# Allegro board LinkingInterfaceV1.3.brd
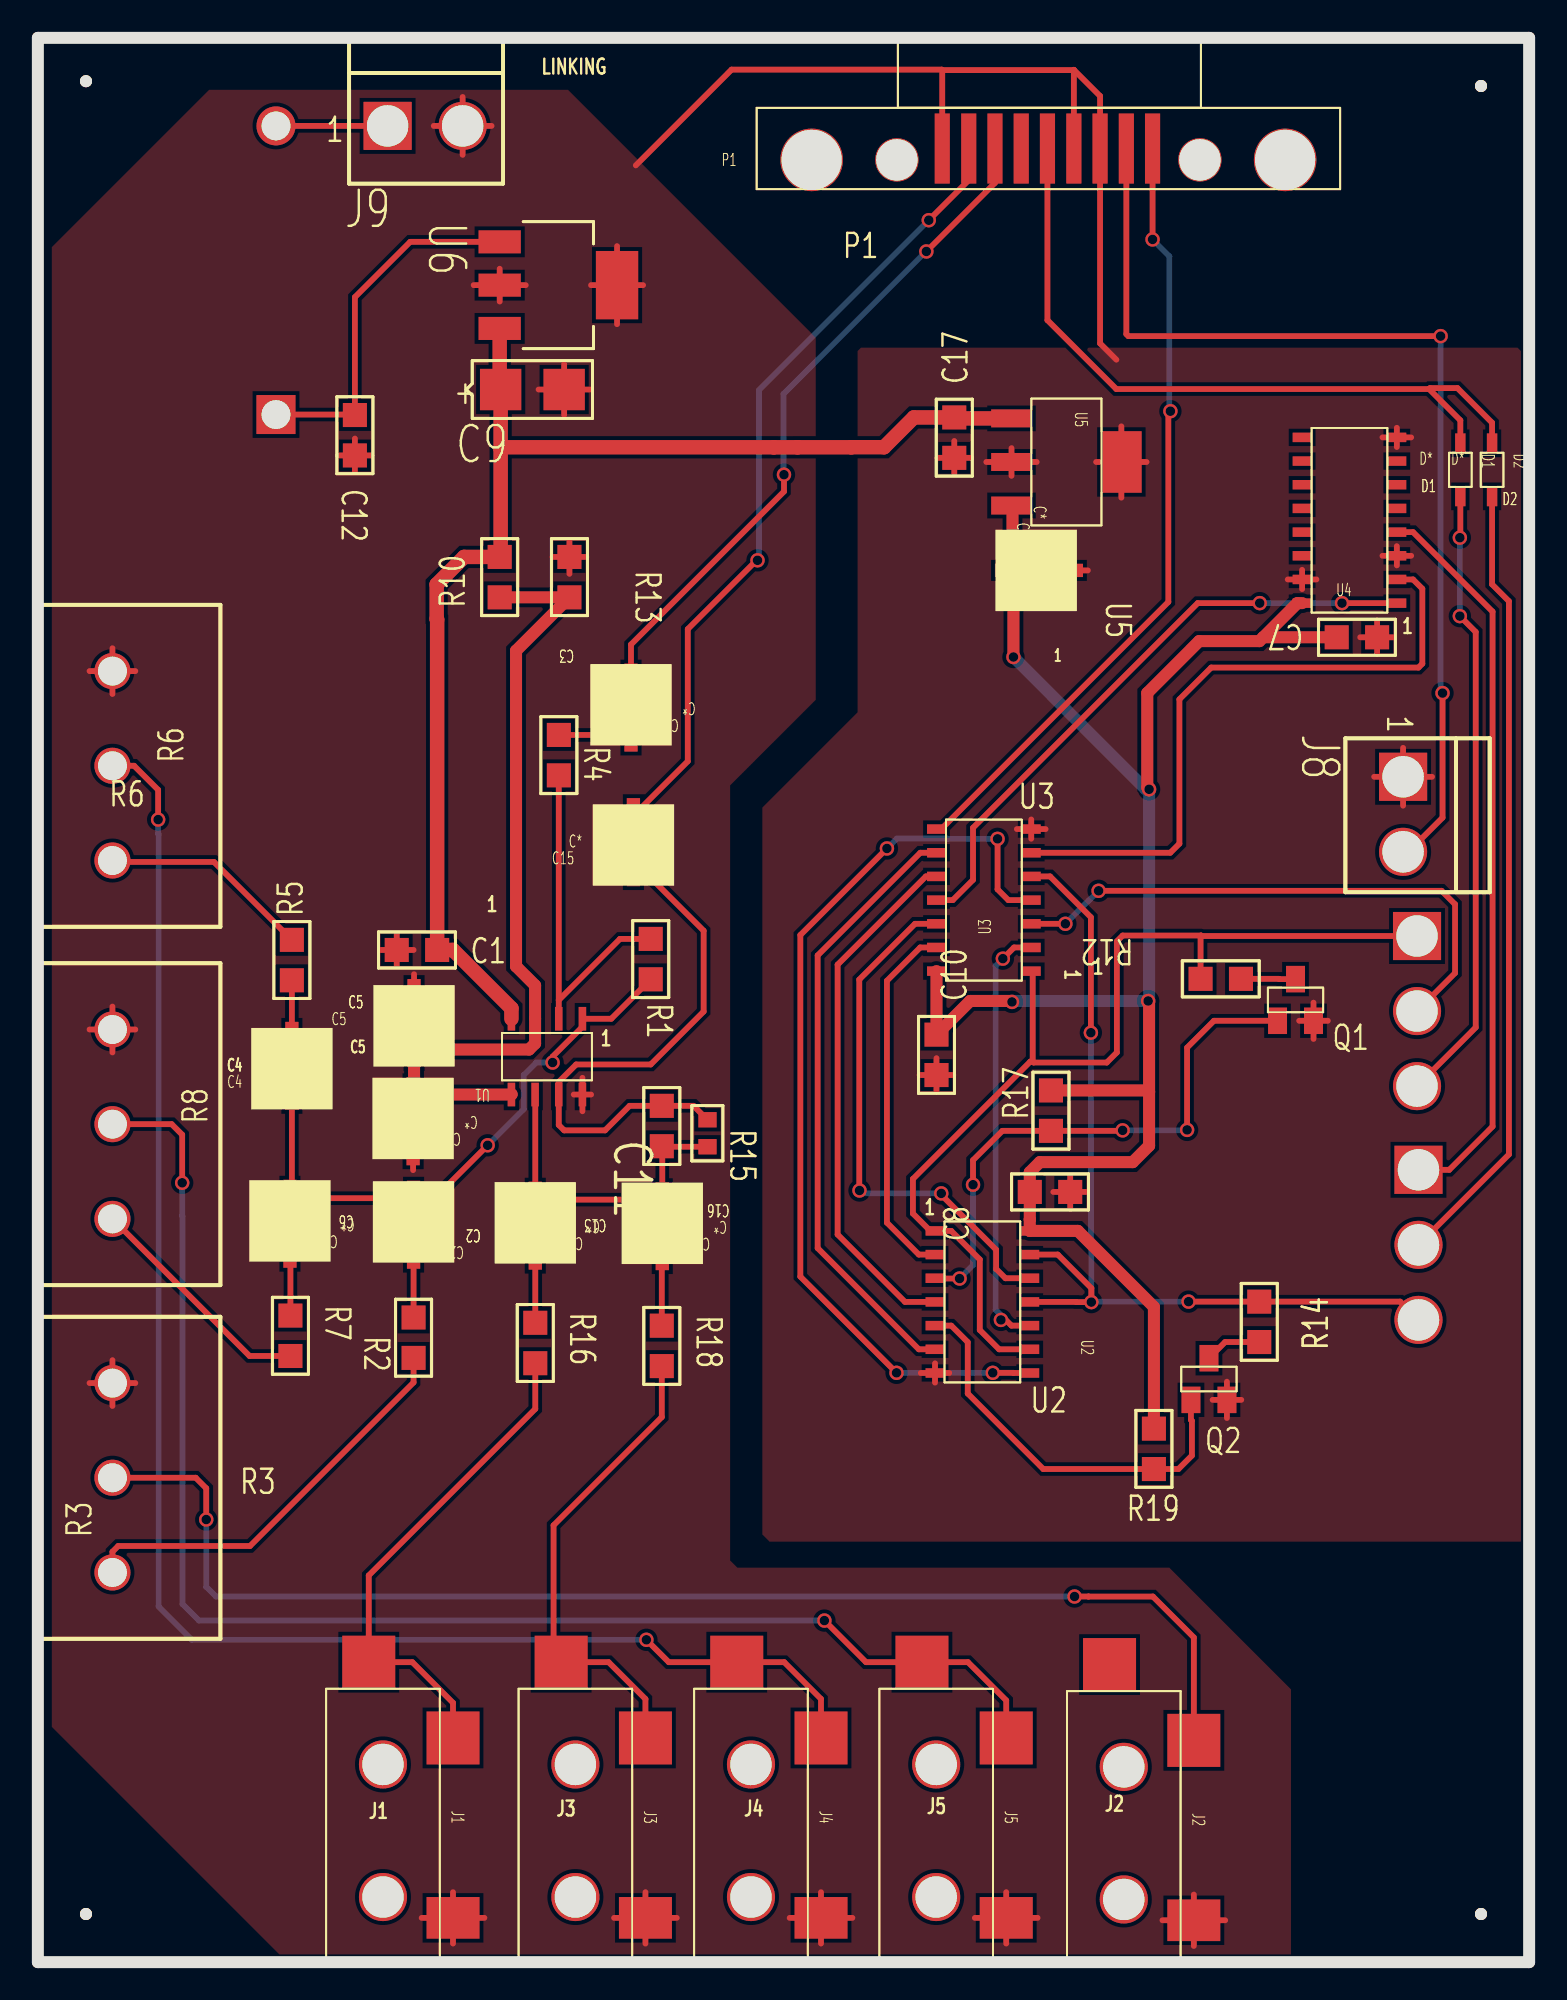
[diagram p0: board, top side]
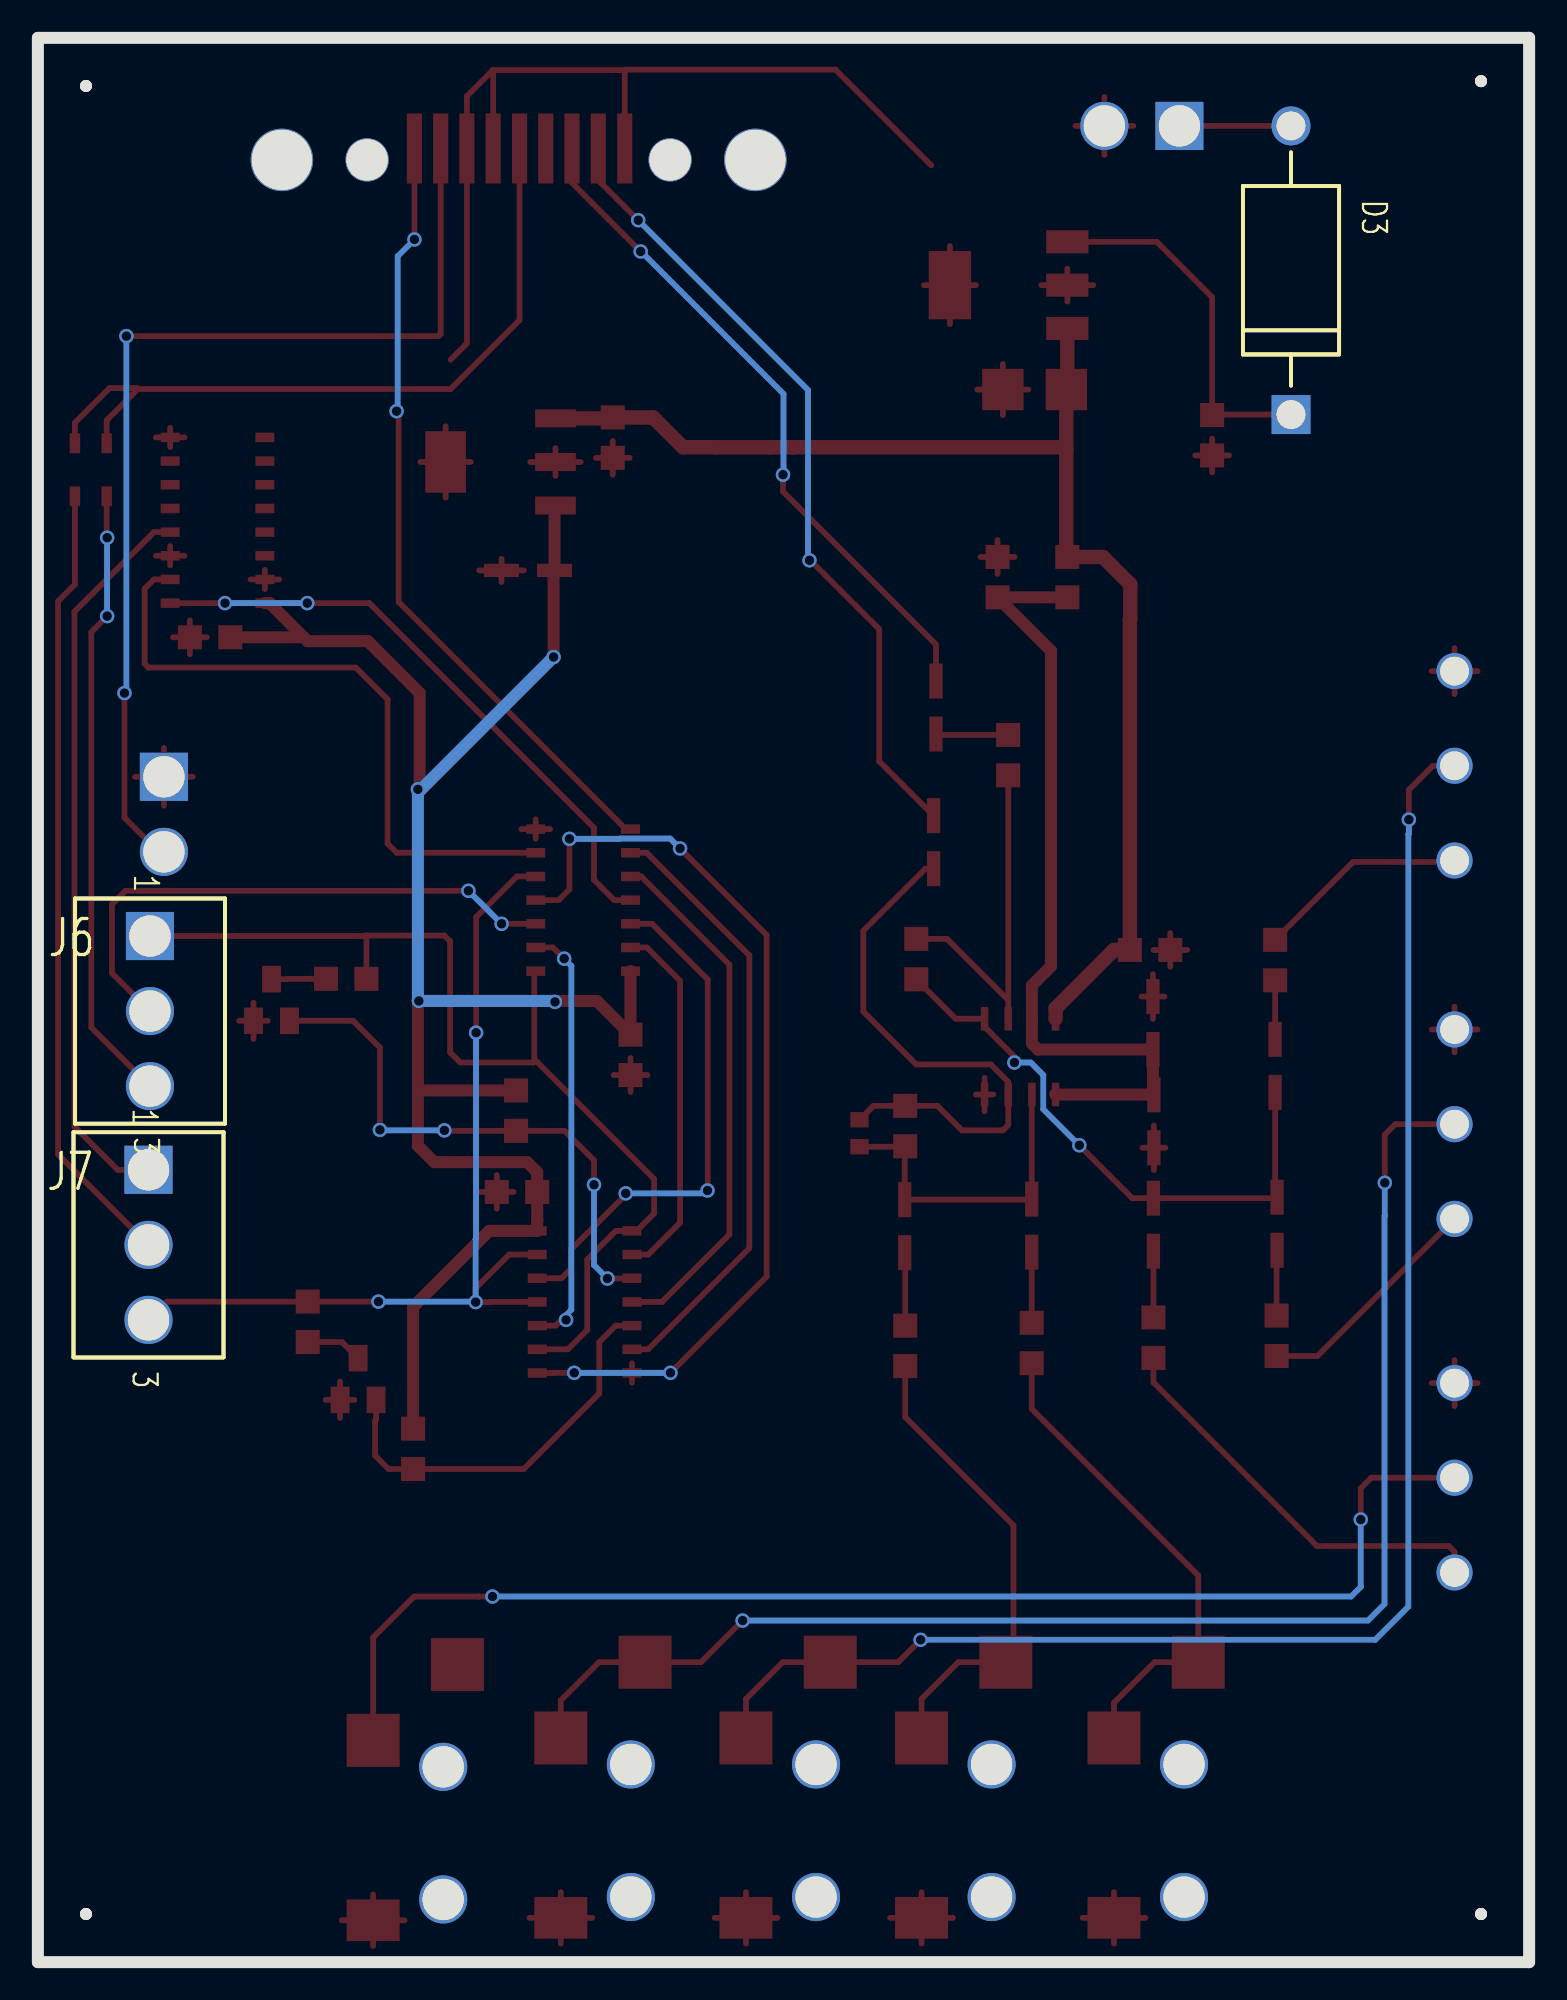
[diagram p1: board, bottom side, seen from below]

Outline 78.74 x 101.6 mm; copper layers: TOP, BOTTOM. Coordinates in mm from the lower left corner of the outline.
Outline path: 0,101.6 78.74,101.6 ; 0,101.6 78.74,101.6 ; 0,101.6 0,0 ; 0,101.6 0,0 ; 78.74,101.6 78.74,0 ; 78.74,101.6 78.74,0 ; 0,0 78.74,0 ; 0,0 78.74,0

## Placement (name value [footprint] x y rotation side)
C1  100nF  [SMC0805]  18.95 53.44 0 top
C2  10uF  [1_UF_CAP]  19.84 40.34 180 top
C3  1uF  [1_UF_CAP]  31.32 67.64 180 top
C4  10uF  [1_UF_CAP]  13.41 45.92 0 top
C5  4.7uF  [1_UF_CAP]  19.86 48.18 0 top
C6  10uF  [1_UF_CAP]  13.31 40.39 180 top
C7  100nF  [SMC0805]  70.71 69.95 180 top
C8  100nF  [SMC0805]  54.51 40.67 180 top
C9  22uF/Tant  [EIAB_SMCT3528_12]  24.43 83.03 0 top
C10  100nF  [SMC0805]  47.45 46.84 90 top
C11  100pF  [SMC0603]  35.36 44.48 270 top
C12  470nF  [SMC0805]  16.74 81.69 270 top
C13  10uF  [1_UF_CAP]  26.26 40.28 180 top
C14  10uF  [1_UF_CAP]  51.46 73.48 270 top
C15  10uF  [1_UF_CAP]  31.45 57.73 0 top
C16  10uF  [1_UF_CAP]  32.97 40.26 180 top
C17  100nF  [SMC0805]  48.39 79.43 90 top
C18  4.7uF  [1_UF_CAP]  19.81 45.8 180 top
D1  1N4148  [1N4148_SOD523]  75.11 77.39 0 top
D2  1N4148  [1N4148_SOD523]  76.78 77.39 0 top
D3  SB1245  [DAX600_60D]  12.57 96.95 270 bottom
J1  TX_ECHOLINK  [35MMJACK]  21.97 2.29 270 top
J2  RX_ECHOLINK  [35MMJACK]  61.09 2.16 270 top
J3  TX_ALLSTAR  [35MMJACK]  32.13 2.29 270 top
J4  RX_ALLSTAR  [35MMJACK]  41.4 2.29 270 top
J5  RX_DTMF  [35MMJACK]  51.18 2.29 270 top
J6  3pinHeader  [BLKCON156VHTM1SQSW3123]  72.82 54.18 270 bottom
J7  3pinHeader  [BLKCON156VHTM1SQSW3123]  72.9 41.83 270 bottom
J8  2Pin Header  [BLKCON156_VHTM1SQ_SW156_2]  72.09 62.59 270 top
J9  0.156 VH  [BLKCON156_VHTM1SQ_SW156_2]  18.47 96.95 0 top
NOREF  -  [unnamed]  76.2 2.54 180 bottom
NOREF#2  -  [unnamed]  2.54 99.31 180 bottom
NOREF#3  -  [unnamed]  2.54 2.54 180 bottom
NOREF#4  -  [unnamed]  76.2 99.06 180 bottom
P1  CONNECTOR DB9  [DB9_263_R001]  47.75 95.76 0 top
Q1  -  [2N4401]  67.39 49.63 0 top
Q2  -  [2N4401]  62.81 29.62 0 top
R1  51k  [SMR0805]  32.36 54.03 270 top
R2  22k  [SMR0805]  19.84 34.04 270 top
R3  10k  [P60-20748]  3.94 20.57 90 top
R4  51k  [SMR0805]  27.51 64.8 270 top
R5  22k  [SMR0805]  13.41 51.84 90 top
R6  10k  [P60-20748]  3.94 58.17 90 top
R7  7.5k  [SMR0805]  13.34 34.14 270 top
R8  10k  [P60-20748]  3.94 39.24 90 top
R10  51k  [SMR0805]  24.38 72.06 90 top
R12  10K  [SMR0805]  63.53 51.92 180 top
R13  51k  [SMR0805]  28.07 74.19 270 top
R14  10K  [SMR0805]  64.49 32.74 90 top
R15  51k  [SMR0805]  32.94 45.21 270 top
R16  51k  [SMR0805]  26.26 33.76 270 top
R17  10K  [SMR0805]  53.49 43.89 90 top
R18  51k  [SMR0805]  32.94 33.6 270 top
R19  10K  [SMR0805]  58.93 26.04 90 top
U1  TL072  [TL082]  28.75 49.81 180 top
U2  74HC04  [74HC0]  47.37 38.61 270 top
U3  74HC08  [74HC0]  52.45 52.32 90 top
U4  -  [74HC157]  71.75 71.76 90 top
U5  LM2936/SOT  [LM2936_SOT]  51.36 81.51 270 top
U6  LM2940 / SOT223  LDO  [SOT223_1234]  24.38 90.83 270 top

## Library data of the parts
C1 C7 C8 C10-C12 C17 = C NP
C2 C4-C6 C14 C15 C18 = CAP POL
C3 C13 C16 = CAPACITOR POL
C9 = C POL
D1 D2 = 1N4148
D3 = DIODE SCHOTTKY_0
J1-J5 = PHONE JACK-3_2
J6 J7 = 3pinHeader_0
J8 = 2Pin Header
J9 = HEADER 2_4
P1 = CONNECTOR DB9
Q1 Q2 = 2N4401
R1 R2 R4 R5 R7 R10 R12-R19 = RESISTOR
R3 R6 R8 = POT
U1 = TL062_2
U2 = 74HC04_4
U3 = 74HC08_3
U4 = 74HC157_4
U5 = LM2936/SO_3
U6 = 78L05/TO92_4

## Footprints (pads in the part's own frame, mm; a bottom-side part is the same pattern mirrored in y, then rotated)
1_UF_CAP
  rect 0.701x1.849 smd: 1(0,0) 2(0,2.799)
1N4148_SOD523
  rect 0.551x1.049 smd: 1(0,0) 2(0,2.799)
2N4401
  rect 1.001x1.4 smd: 1(-0.03,0.071) 2(-0.98,2.271) 3(-1.93,0.071)
35MMJACK
  round 2.54 hole 2.184: (-8.151,-3.749) (-1.151,-3.749)
  rect 2.2x2.799 smd: 1(-0.051,-0.051)
  rect 2.799x2.799 smd: 2(-9.55,-0.051) 3(-13.551,-4.501)
74HC0
  rect 0.5x1.001 smd: 1(0,0) 2(1.25,0) 3(2.499,0) 4(3.749,0) 5(5.001,0) 6(6.251,0) 7(7.501,0) 8(7.501,5.001) 9(6.251,5.001) 10(5.001,5.001) 11(3.749,5.001) 12(2.499,5.001) 13(1.25,5.001) 14(0,5.001)
74HC157
  rect 0.5x1.001 smd: 1(0,0) 2(1.25,0) 3(2.499,0) 4(3.749,0) 5(5.001,0) 6(6.251,0) 7(7.501,0) 8(8.75,0) 9(8.75,5.001) 10(7.501,5.001) 11(6.251,5.001) 12(5.001,5.001) 13(3.749,5.001) 14(2.499,5.001) 15(1.25,5.001) 16(0,5.001)
BLKCON156_VHTM1SQ_SW156_2
  rect 2.54x2.54 hole 2.184: 1(0,0)
  round 2.54 hole 2.184: 2(3.962,0)
BLKCON156VHTM1SQSW3123
  rect 2.54x2.54 hole 2.184: 1(0,0)
  round 2.54 hole 2.184: 2(3.962,0) 3(7.925,0)
DAX600_60D
  round 2.057 hole 1.524: 1(0,0)
  rect 2.057x2.057 hole 1.524: 2(15.24,0)
DB9_263_R001
  round 3.302 hole 3.175: (-6.896,-0.599) (18.105,-0.599)
  round 2.286 hole 2.184 unplated: (-2.395,-0.599) (13.604,-0.599)
  rect 0.8x3.701 smd: 1(0,0) 2(1.4,0) 3(2.784,0) 4(4.171,0) 5(5.555,0) 6(6.949,0) 7(8.334,0) 8(9.721,0) 9(11.105,0)
EIAB_SMCT3528_12
  rect 2.184x2.184 smd: 1(0,0) 2(3.353,0)
LM2936_SOT
  rect 0.95x2.149 smd: 1(0,0.051) 2(2.301,0.051) 3(4.6,0.051)
  rect 3.251x2.149 smd: 4(2.301,5.85)
P60-20748
  round 1.905 hole 1.524: 1(0,0) 2(5.001,0) 3(10,0)
SMC0603
  rect 0.813x0.965 smd: 1(0,0) 2(1.422,0)
SMC0805
  rect 1.27x1.27 smd: 1(0,0) 2(2.134,0)
SMR0805
  rect 1.27x1.27 smd: 1(0,0) 2(2.134,0)
SOT223_1234
  rect 1.219x2.235 smd: 1(0,0) 2(2.286,0) 3(4.572,0)
  rect 3.607x2.235 smd: 4(2.286,6.198)
TL082
  rect 0.399x1.25 smd: 1(0,0) 2(1.25,0) 3(2.499,0) 4(3.749,0) 5(3.749,4) 6(2.499,4) 7(1.25,4) 8(0,4)
unnamed
  round 0.635 hole 3.175 unplated: (0,0)

## Nets
+4.5V: C5.1 C18.1 R10.1 R13.2 U1.3(+IN) U1.5(+IN)
+5V: C7.2(B) C8.2(B) C10.2(B) C14.1 R17.2 R19.2 U2.14(+5V) U3.14(+5V) U4.16(+5V) U5.3(VOUT)
+9V: C1.2(B) C9.1(P) C17.2(B) R10.2 U1.4(+9V) U5.1(VIN) U6.3(OUT)
GND: C1.1(A) C5.2 C7.1(A) C8.1(A) C9.2(N) C10.1(A) C12.2(B) C14.2 C17.1(A) C18.2 J1.1 J2.1 J3.1 J4.1 J5.1 J8.1 J9.2 P1.1 P1.6 P1.7 Q1.1(EMITTER) Q2.1(EMITTER) R3.3(B) R6.3(B) R8.3(B) R13.1 U1.8(GND) U2.7(GND) U3.7(GND) U4.3(1B) U4.8(GND) U4.15(E\N\) U5.2(GND#2) U5.4(GND#4) U6.2(G1) U6.4(G2)
AUDIO_AUX: C3.1 P1.3
AUDIOOUT: C15.2 P1.2
COS: D1.2 D2.2 P1.5
COS_ALLSTAR: D2.1 J7.2
COS_ECHOLINK: D1.1 J6.3
DTMF_AUDIO: J5.2 J5.3 R8.2(WIPER)
INHIBIT: J8.2 P1.8
MUTE_A: J7.1 U4.4(1Y)
MUTE_E: J6.2 U3.3(Y)
PTT: P1.9 U3.8(Y)
PTT_A: J7.3 R14.2 U2.11(A) U2.13(A) U3.5(B)
PTT_E: J6.1 R12.2 U2.1(A) U2.9(A) U3.1(A)
RX_A: J4.2 J4.3 R6.2(WIPER)
RX_E: J2.2 R3.2(WIPER)
TX_A: J3.2 J3.3 R18.2
N88507: C11.2(B) C13.1 C16.1 R15.2 U1.6(-IN)
N88575: C11.1(A) C15.1 R15.1 U1.7(OUT)
N89923: C2.1 C4.1 C6.1 R1.2 U1.1(OUT)
N90145: C13.2 R16.1
N90149: C16.2 R18.1
N90821: Q2.3(COLLECTOR) R19.1 U2.5(A)
N90849: R1.1 R4.2 U1.2(-IN)
N95414: U3.6(Y) U4.2(1A)
N95479: U2.2(Y) U3.13(B)
N97065: Q1.3(COLLECTOR) R17.1 U2.3(A)
N97388: Q1.2(BASE) R12.1
N97431: Q2.2(BASE) R14.1
N101741: U3.11(Y) U4.1(SEL)
N134507: C2.2 R2.1
N134567: C6.2 R7.1
N134575: C4.2 R5.1
N134810: R2.2 R3.1(A)
N146635: U2.4(Y) U3.10(B)
N146671: U2.6(Y) U3.9(A)
N163525: U2.10(Y) U3.2(B)
N178407: U2.12(Y) U3.12(A)
N195958: J1.2 J1.3 R16.2
N211815: U2.8(Y) U3.4(A)
N903830: R7.2 R8.1(A)
N904010: R5.2 R6.1(A)
N908811: C3.2 R4.1
N14521945: C12.1(A) D3.2(CATHODE) U6.1(IN)
N14522952: D3.1(ANODE) J9.1

Pads without a net: J2 3; P1 4; U4 5 6 7 9 10 11 12 13 14

## Via types
v1: diameter 0.762, hole 0.508, TOP to BOTTOM, 41 vias

## Routing (per net, layer and track width the routed paths; a pad name or vN(x,y) marks a point on that pad's centre or on a via; arc(x,y) is an arc through that point)
+4.5V: length 43
  TOP w0.635: 25.02,45.82 U1.5 19.82,45.81 ; C18.1 19.82,45.81 ; 19.82,45.81 19.86,45.85 C5.1 25.93,48.18 26.25,48.5 U1.3 26.25,51.57 25.25,52.58 25.25,69.24 R13.2 R10.1
+5V: length 101.2
  TOP w0.635: U5.3 51.46,76.86 C14.1 51.51,73.43 v1(51.51,68.91) ; 64.7,69.95 64.5,69.75 61.32,69.75 58.58,67.01 58.58,62.02 v1(58.67,61.93) ; 64.7,69.95 66.5,71.76 U4.16 ; 64.7,69.95 C7.2 ; 47.45,48.97 49.23,50.75 51.38,50.75 v1(51.44,50.7) ; 47.45,48.97 U3.14 ; 47.45,48.97 C10.2 ; 58.67,45.95 58.67,50.7 v1(58.62,50.75) ; 58.67,45.95 58.67,43.1 57.81,42.24 52.91,42.24 52.37,41.71 C8.2 52.37,39.22 52.37,39.22 U2.14 54.91,38.61 58.93,34.59 R19.2 ; 58.67,45.95 58.6,46.02 R17.2
  BOTTOM w0.635: v1(51.44,50.7) 51.49,50.75 v1(58.62,50.75) 58.67,50.8 v1(58.67,61.93) 58.5,61.93 v1(51.51,68.91)
+9V: length 68.8
  TOP w0.762: 24.43,79.88 24.43,74.24 R10.2 22.5,74.19 21.06,72.75 21.06,70.92 21.08,70.89 C1.2 21.92,53.44 25,50.36 U1.4 ; 24.43,79.88 C9.1 24.38,83.08 U6.3 ; 24.43,79.88 24.54,79.98 38.86,79.98 38.86,79.98 40.11,79.98 40.11,79.98 42.95,79.98 42.95,79.99 44.68,79.99 46.25,81.56 C17.2 48.44,81.51 U5.1
GND: length 191.8
  TOP w0.305: J4.1 43.01,2.34 ; J4.1 41.35,0.98 ; J4.1 39.7,2.34 ; J4.1 41.35,3.69 ; 18.06,53.44 C1.1 ; C1.1 18.95,52.55 ; C1.1 19.84,53.44 ; C1.1 18.95,54.33 ; 19.2,43 C18.2 ; C18.2 19.81,41.82 ; C18.2 20.42,43 ; C18.2 19.81,44.18 ; U4.15 67.51,73 ; U4.15 66.75,73.51 ; U4.15 66,73 ; U4.15 66.75,72.5 ; U1.8 28.75,46.69 ; U1.8 28.3,45.81 ; U1.8 29.21,45.81 ; U1.8 28.75,44.93 ; 29.21,88.54 U6.4 ; U6.4 30.58,86.48 ; U6.4 30.58,90.6 ; U6.4 31.96,88.54 ; Q2.1 63.54,29.69 ; Q2.1 62.78,28.73 ; Q2.1 62.03,29.69 ; Q2.1 62.78,30.65 ; U4.3 72.51,74.25 ; U4.3 71.75,73.75 ; U4.3 71.75,74.76 ; U4.3 71,74.25 ; U5.2 52.74,79.21 ; U5.2 51.41,79.94 ; U5.2 50.08,79.21 ; U5.2 51.41,78.48 ; Q1.1 68.11,49.7 ; Q1.1 67.36,48.75 ; Q1.1 66.6,49.7 ; Q1.1 67.36,50.66 ; R3.3 5.15,30.57 ; R3.3 3.94,29.36 ; R3.3 2.73,30.57 ; R3.3 3.94,31.78 ; 19.26,50.98 C5.2 ; C5.2 19.86,49.8 ; C5.2 19.86,52.16 ; C5.2 20.47,50.98 ; 20.26,2.34 J1.1 ; J1.1 21.92,3.69 ; J1.1 21.92,0.98 ; J1.1 23.58,2.34 ; U2.7 48.13,31.11 ; U2.7 46.61,31.11 ; U2.7 47.37,30.6 ; U2.7 47.37,31.62 ; 54.7,99.91 56.09,98.53 P1.7 56.09,85.47 56.95,84.61 ; 54.7,99.91 54.69,99.9 47.75,99.9 ; 54.7,99.91 P1.6 ; 23.01,88.54 U6.2 ; U6.2 24.38,89.41 ; U6.2 24.38,87.68 ; U6.2 25.76,88.54 ; R13.1 28.96,74.19 ; R13.1 28.07,75.08 ; R13.1 28.07,73.3 ; R13.1 27.18,74.19 ; J2.1 62.69,2.21 ; J2.1 61.04,3.57 ; J2.1 61.04,0.85 ; J2.1 59.38,2.21 ; C9.2 27.79,84.38 ; C9.2 26.44,83.03 ; C9.2 27.79,81.68 ; C9.2 29.14,83.03 ; 20.9,96.95 J9.2 ; J9.2 23.95,96.95 ; J9.2 22.43,95.43 ; J9.2 22.43,98.48 ; J8.1 73.61,62.59 ; J8.1 72.09,64.11 ; J8.1 70.56,62.59 ; J8.1 72.09,61.06 ; 3.94,48.03 R8.3 ; R8.3 5.15,49.24 ; R8.3 3.94,50.45 ; R8.3 2.73,49.24 ; 48.39,78.53 C17.1 ; C17.1 49.28,79.43 ; C17.1 47.5,79.43 ; C17.1 48.39,80.32 ; C8.1 54.51,41.56 ; C8.1 54.51,39.77 ; C8.1 53.62,40.67 ; C8.1 55.4,40.67 ; 51.69,59.82 U3.7 ; U3.7 53.21,59.82 ; U3.7 52.45,60.33 ; U3.7 52.45,59.32 ; 32.08,0.98 J3.1 ; J3.1 32.08,3.69 ; J3.1 33.74,2.34 ; J3.1 30.42,2.34 ; C12.2 16.74,80.44 ; C12.2 17.63,79.55 ; C12.2 16.74,78.66 ; C12.2 15.85,79.55 ; 53.08,73.48 C14.2 ; C14.2 54.26,74.09 ; C14.2 54.26,72.88 ; C14.2 55.44,73.48 ; 55.88,79.21 U5.4 ; U5.4 57.21,81.09 ; U5.4 57.21,77.33 ; U5.4 58.54,79.21 ; 3.94,66.96 R6.3 ; R6.3 3.94,69.38 ; R6.3 5.15,68.17 ; R6.3 2.73,68.17 ; 69.82,69.95 C7.1 ; C7.1 70.71,70.84 ; C7.1 71.61,69.95 ; C7.1 70.71,69.06 ; 49.47,2.34 J5.1 ; J5.1 51.13,0.98 ; J5.1 51.13,3.69 ; J5.1 52.79,2.34 ; U4.8 71.75,81.01 ; U4.8 72.51,80.51 ; U4.8 71,80.51 ; U4.8 71.75,80 ; 46.56,46.84 C10.1 ; C10.1 47.45,47.73 ; C10.1 48.34,46.84 ; C10.1 47.45,45.95 ; P1.1 47.75,99.9 ; 47.75,99.9 47.73,99.92 36.63,99.92 31.57,94.87
AUDIO_AUX: length 36.1
  TOP w0.305: C3.1 31.32,69.57 39.4,77.65 v1(39.4,78.54) ; P1.3 50.54,93.94 v1(46.91,90.32)
  BOTTOM w0.305: v1(39.4,78.54) 39.37,78.56 39.37,82.8 46.89,90.32 v1(46.91,90.32)
AUDIOOUT: length 42.6
  TOP w0.305: C15.2 34.32,63.4 34.32,70.38 37.95,74.02 v1(38,74.02) ; v1(47.04,91.97) 49.15,94.08 P1.2
  BOTTOM w0.305: v1(47.04,91.97) 38.07,83.01 38.07,74.14 38,74.07 v1(38,74.02)
COS: length 39.5
  TOP w0.305: 73.46,83.06 75.11,81.41 D1.2 ; 73.46,83.06 56.94,83.06 53.31,86.7 P1.5 ; 73.46,83.06 73.51,83.11 74.96,83.11 76.78,81.28 D2.2
COS_ALLSTAR: length 41.9
  TOP w0.305: J7.2 77.67,42.65 77.67,71.86 76.78,72.75 D2.1
COS_ECHOLINK: length 32.8
  TOP w0.305: v1(75.08,75.21) 75.11,75.23 D1.1 ; J6.3 75.92,49.35 75.92,70.23 v1(75.08,71.07)
  BOTTOM w0.305: v1(75.08,71.07) v1(75.08,75.21)
DTMF_AUDIO: length 76.3
  TOP w0.305: v1(41.53,18.03) 43.73,15.84 J5.3 49.11,15.84 51.13,13.82 J5.2 ; R8.2 7.06,44.24 7.62,43.69 v1(7.62,41.15)
  BOTTOM w0.305: v1(7.62,41.15) 7.62,39.4 7.64,39.39 7.64,18.91 8.51,18.03 v1(41.53,18.03)
INHIBIT: length 54.7
  TOP w0.305: v1(74.17,67.01) 74.17,60.43 72.36,58.62 J8.2 ; v1(74.07,85.85) 57.58,85.85 57.47,85.96 P1.8
  BOTTOM w0.305: v1(74.07,85.85) 74.07,67.11 v1(74.17,67.01)
MUTE_A: length 38.8
  TOP w0.305: U4.4 72.61,75.5 76.81,71.31 76.81,44.12 74.52,41.83 J7.1
MUTE_E: length 29.9
  TOP w0.305: U3.3 v1(54.25,54.82) ; J6.2 74.83,52.22 74.83,55.85 74.12,56.57 v1(56.01,56.57)
  BOTTOM w0.305: v1(56.01,56.57) 55.48,56.04 55.47,56.04 v1(54.25,54.82)
PTT: length 41.6
  TOP w0.305: U3.8 47.7,59.82 59.69,71.82 59.69,81.78 v1(59.8,81.89) ; v1(58.86,90.96) P1.9
  BOTTOM w0.305: v1(59.8,81.89) 59.74,81.95 59.74,90.07 v1(58.86,90.96)
PTT_A: length 50
  TOP w0.305: v1(55.6,49.07) 55.6,55.17 53.44,57.33 U3.5 ; v1(60.76,34.87) R14.2 71.93,34.87 J7.3 ; U2.13 53.85,37.36 55.63,35.59 v1(55.63,34.85) 54.84,34.85 54.83,34.86 U2.11
  BOTTOM w0.305: v1(55.6,49.07) 55.6,38.2 55.63,38.18 v1(55.63,34.85) 55.65,34.87 v1(60.76,34.87)
PTT_E: length 55.7
  TOP w0.305: 61.42,54.2 61.39,54.18 R12.2 ; 61.42,54.2 57.28,54.2 56.97,53.9 56.97,48.03 56.44,47.5 52.58,47.5 52.53,47.55 ; 61.42,54.2 61.44,54.18 J6.1 ; 52.53,47.55 52.53,52.25 U3.1 ; 52.53,47.55 52.4,47.55 46.2,41.35 46.2,39.53 47.12,38.61 U2.1 48.23,38.61 49.73,37.1 49.73,33.38 50.75,32.36 U2.9
RX_A: length 85.1
  TOP w0.305: v1(32.13,17.02) 33.31,15.84 J4.3 39.41,15.84 41.35,13.89 J4.2 ; v1(6.35,60.33) 6.35,61.9 5.08,63.17 R6.2
  BOTTOM w0.305: v1(6.35,60.33) 6.35,59.59 6.38,59.56 6.38,18.77 8.13,17.02 v1(32.13,17.02)
RX_E: length 69.1
  TOP w0.305: R3.2 8.33,25.58 8.89,25.02 v1(8.89,23.37) ; J2.2 61.04,17.14 58.88,19.3 55.48,19.3 55.47,19.3 v1(54.74,19.3)
  BOTTOM w0.305: v1(8.89,23.37) 8.89,19.81 9.4,19.3 v1(54.74,19.3)
TX_A: length 25.9
  TOP w0.305: R18.2 32.94,28.78 27.23,23.06 27.23,16.24 J3.3 ; J3.2 32.08,13.89 30.14,15.84 J3.3 ; J3.3 27.25,15.84
N88507: length 17.5
  TOP w0.305: 32.97,43.05 C16.1 26.29,40.26 C13.1 26.26,45.8 U1.6 ; 32.97,43.05 C11.2 ; 32.97,43.05 R15.2
N88575: length 29.6
  TOP w0.305: C11.1 34.62,45.21 R15.1 31.24,45.21 29.95,43.92 27.79,43.92 27.5,44.2 U1.7 27.5,46.48 28.42,47.4 32.36,47.4 35.15,50.19 35.15,54.46 31.88,57.73 C15.1
N89923: length 30.9
  TOP w0.305: R1.2 30.28,49.81 U1.1 28.75,49.39 27.18,47.81 v1(27.18,47.5) ; v1(23.75,43.13) 20.96,40.34 C2.1 13.36,40.34 C6.1 13.41,40.49 C4.1
  BOTTOM w0.305: v1(23.75,43.13) 25.65,45.03 25.65,46.84 26.31,47.5 v1(27.18,47.5)
N90145: length 3.7
  TOP w0.305: R16.1 C13.2
N90149: length 3.9
  TOP w0.305: C16.2 32.94,37.43 R18.1
N90821: length 21.5
  TOP w0.305: U2.5 48.23,33.61 49.1,32.74 49.1,30.02 53.09,26.04 R19.1 60.22,26.04 60.93,26.75 60.93,28.58 60.88,28.63 Q2.3
N90849: length 19
  TOP w0.305: R4.2 27.5,62.66 27.5,50.79 ; 27.5,50.79 30.73,54.03 R1.1 ; 27.5,50.79 U1.2
N95414: length 34.8
  TOP w0.305: U3.6 59.79,58.57 60.27,59.05 60.27,66.67 61.95,68.35 72.9,68.35 73.1,68.55 73.1,72.51 72.61,73 U4.2
N95479: length 19.4
  TOP w0.305: U2.2 46.52,37.36 44.83,39.04 44.83,51.82 46.59,53.57 U3.13
N97065: length 29.5
  TOP w0.305: v1(57.28,43.92) 57.25,43.89 R17.1 50.93,43.89 49.38,42.34 v1(49.38,41.05) ; Q1.3 62.1,49.7 60.68,48.29 v1(60.68,43.94) ; v1(48.67,36.09) 47.39,36.09 U2.3
  BOTTOM w0.305: v1(48.67,36.09) 49.38,36.8 v1(49.38,41.05) ; v1(60.68,43.94) 60.5,43.94 60.48,43.92 v1(57.28,43.92)
N97388: length 2.9
  TOP w0.305: R12.1 65.53,51.92 65.55,51.9 Q1.2
N97431: length 3
  TOP w0.305: R14.1 62.69,32.74 Q2.2
N101741: length 32.4
  TOP w0.305: U4.1 v1(68.86,71.76) ; v1(64.52,71.76) 61.24,71.76 49.38,59.89 49.38,57.14 48.31,56.07 U3.11
  BOTTOM w0.305: v1(68.86,71.76) v1(64.52,71.76)
N134507: length 3.5
  TOP w0.305: R2.1 C2.2
N134567: length 3.5
  TOP w0.305: C6.2 13.34,37.56 R7.1
N134575: length 3.1
  TOP w0.305: R5.1 C4.2
N134810: length 22
  TOP w0.305: R3.1 3.94,21.67 4.24,21.97 11.2,21.97 19.84,30.61 R2.2
N146635: length 28
  TOP w0.305: U3.10 46.89,57.33 42.23,52.67 42.23,38.42 45.79,34.86 U2.4
N146671: length 32.4
  TOP w0.305: U2.6 46.52,32.36 41.17,37.7 41.17,53.15 46.59,58.57 U3.9
N163525: length 22.7
  TOP w0.305: v1(50.85,33.91) 51.1,33.91 51.41,33.61 U2.10 ; v1(50.95,52.98) 51.54,53.57 U3.2
  BOTTOM w0.305: v1(50.85,33.91) 50.85,34.16 50.57,34.44 50.57,52.6 v1(50.95,52.98)
N178407: length 28
  TOP w0.305: v1(43.38,40.74) 43.37,40.75 43.37,51.88 46.31,54.82 U3.12 ; U2.12 51.09,36.11 50.6,36.6 50.6,37.62 47.7,40.51 v1(47.7,40.59)
  BOTTOM w0.305: v1(47.7,40.59) 43.54,40.59 v1(43.38,40.74)
N195958: length 26.6
  TOP w0.305: J1.2 21.92,13.69 19.77,15.84 J1.3 17.47,20.42 26.26,29.21 R16.2
N211815: length 49.5
  TOP w0.305: v1(50.42,31.11) 51.51,31.11 51.52,31.11 U2.8 ; U3.4 51.24,56.07 50.67,56.64 v1(50.67,59.31) ; v1(45.34,31.11) 40.26,36.2 40.26,54.23 v1(44.83,58.8)
  BOTTOM w0.305: v1(50.42,31.11) v1(45.34,31.11) ; v1(50.67,59.31) 48.01,59.31 47.99,59.32 45.35,59.32 v1(44.83,58.8)
N903830: length 12.4
  TOP w0.305: R8.1 11.18,32 R7.2
N904010: length 11.2
  TOP w0.305: R6.1 4.01,58.09 9.3,58.09 R5.2
N908811: length 3.9
  TOP w0.305: R4.1 31.27,64.8 C3.2 31.37,64.79
N14521945: length 19.3
  TOP w0.305: U6.1 19.66,90.83 16.74,87.91 C12.1 16.71,81.71 D3.2
N14522952: length 5.9
  TOP w0.305: J9.1 D3.1

## Copper pours and planes (outline as drawn; the poured copper is in the pictures)
GND on TOP: 66.17,0.41 66.17,14.4 59.74,20.83 36.93,20.83 36.55,21.21 36.55,62.13 41.07,66.65 41.07,85.78 27.99,98.86 9.04,98.86 0.74,90.55 0.74,12.42 12.75,0.41
GND on TOP: 38.63,22.2 78.28,22.2 78.31,22.23 78.31,85.06 78.13,85.24 43.46,85.24 43.28,85.06 43.28,65.99 38.25,60.96 38.25,22.58

## Text on the board
Board Geometry/Soldermask Bottom: SMB
Ref Des/Silkscreen Bottom: SSB
TOP: TOP
Board Geometry/Soldermask Top: SMT
Ref Des/Silkscreen Top: C4 | C5 | 1 | J1 | LINKING | J3 | J4 | J5 | J2 | R6 | R3 | P1 | U3 | U2 | U5 | SST
COMPVAL_TYPE_TOP: FIGURE | SIZE | 125.0 | 86.0 | 60.0 | 20.0 | DRILL CHART: TOP to BOTTOM | ALL UNITS ARE IN MILS | PLATED | NON-PLATED | QTY | 2 | 10 | 1 | 9 | 41 | 4
User.5: BOTTOM
User.6: MECH
